# EAGLE board teensy-dsc (EAGLE 7.2.0)
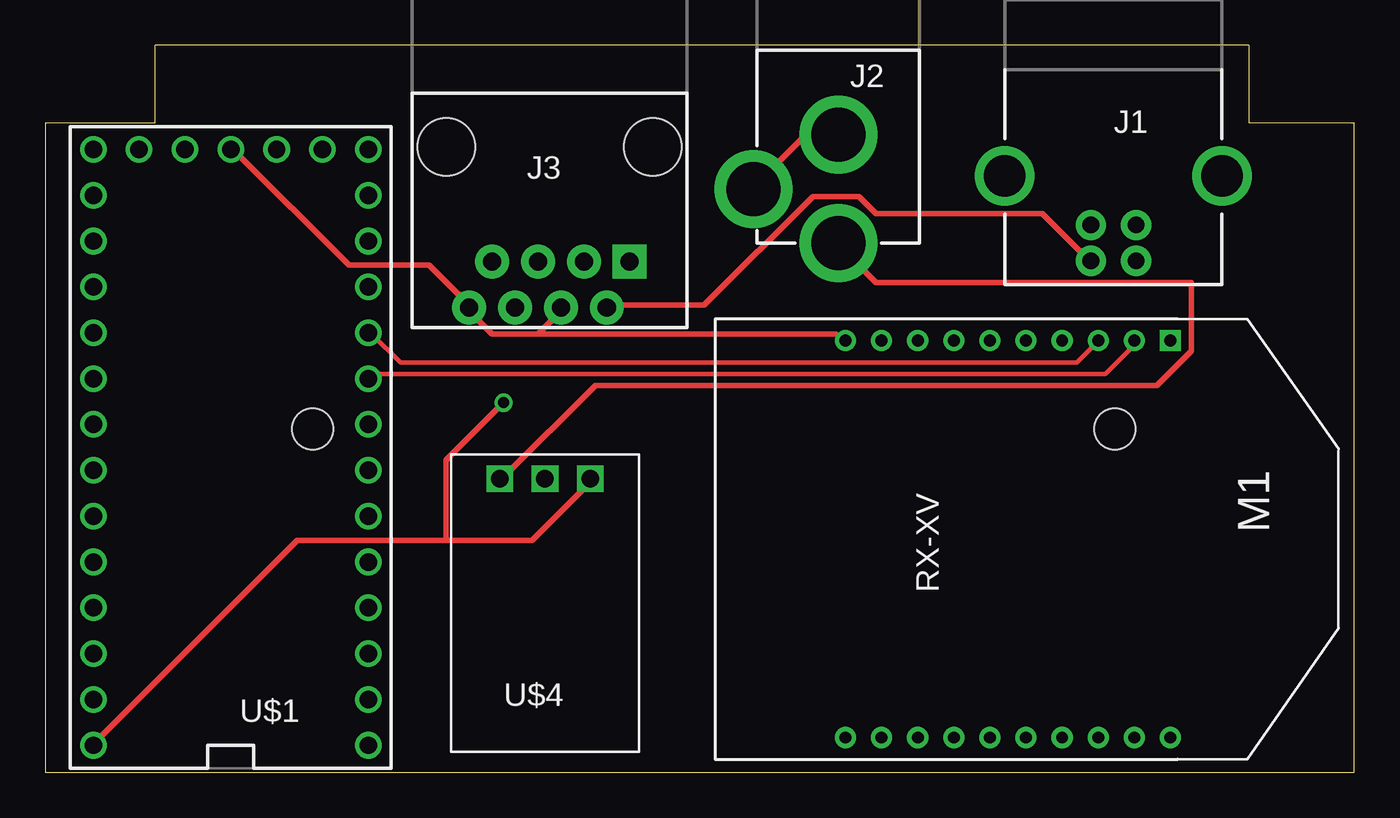
[diagram p0: board, top side]
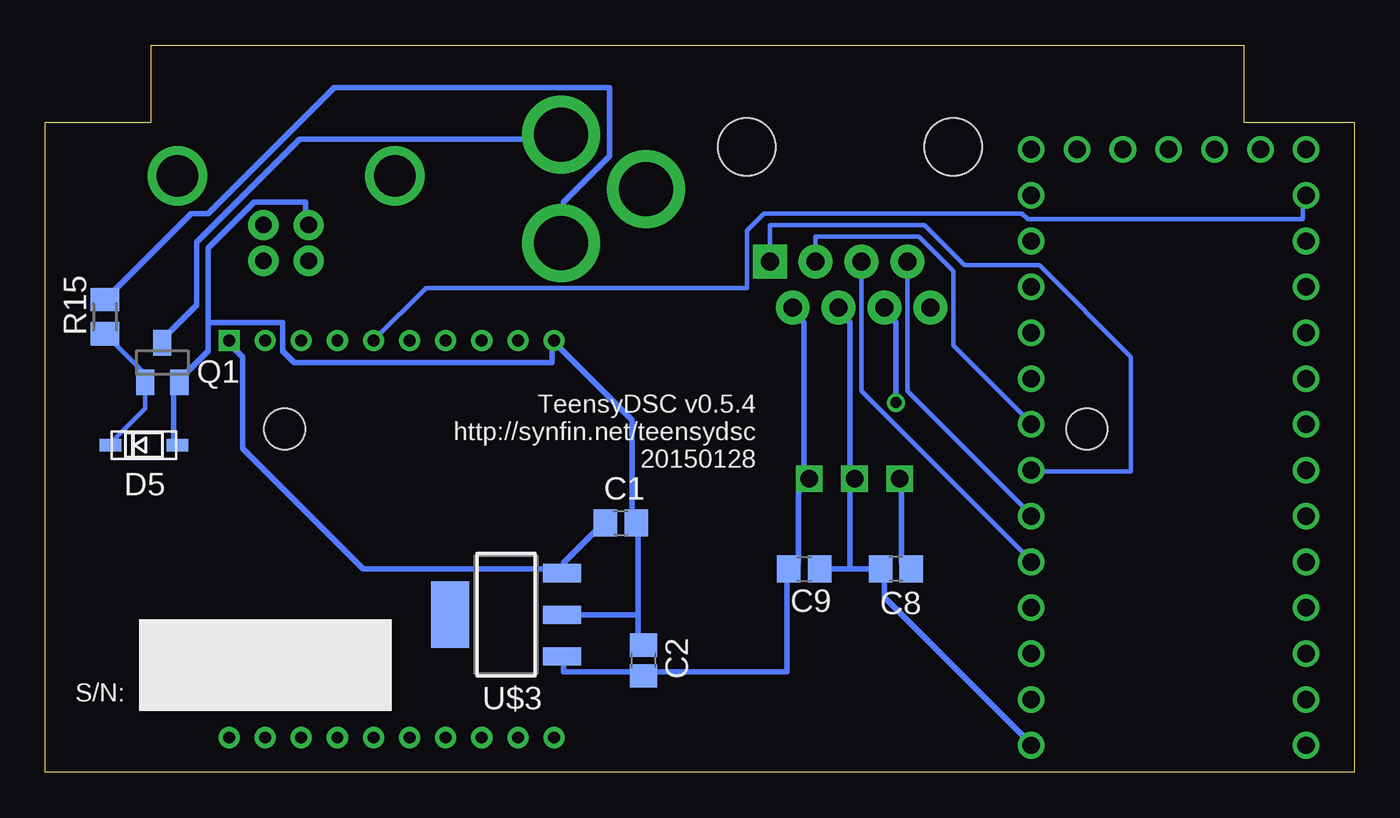
[diagram p1: board, bottom side, seen from below]

Size 72.53 x 40.3 mm. Coordinates in mm from the lower left corner, seen from the top.
Outline: 0,0 72.53,0 72.53,36 66.67,36 66.67,40.3 6.1,40.3 6.1,36 0,36 0,0
Copper layers (1*16): Top 0.035mm / dielectric 1.5mm / Bottom 0.035mm
Design rules "default": minimum track width 10mil, minimum drill 24mil, track to track 8mil, track to pad 8mil, pad to pad 8mil, via to via 8mil, smd to smd 8mil, copper to edge 40mil, drill to drill 8mil, minimum pad ring 10mil, minimum via ring 8mil, stop-mask expansion 4mil, vias tented up to drill 0mil, thermal gap 10mil
Net classes: 0 default: width 0.152 mm, clearance 0.127 mm; 1 5V: width 0.305 mm, clearance 0.127 mm; 2 GND: width 0.305 mm, clearance 0.127 mm; 3 12V: width 0.305 mm, clearance 0.127 mm
Holes 2.29 mm at 14.81,19.03 59.26,19.03

## Footprints (pad centres in the part's own frame; a part is rotated, then mirrored left to right if it is on the bottom)
C0805 = smd 1.3 x 1.5: 1 -0.85,0; 2 0.85,0
SOD-123 = smd 1.2 x 0.7: A 1.85,0; C -1.85,0
USB-B-PTH = drill 0.914 pad 1.676: D+ 0,1.25; D- 1.981,1.25; GND 0,-1.25; VBUS 1.981,-1.25 | drill 2.286: S1 -2.718,-6.02; S2 -2.718,6.02
POWER_JACK_PTH = drill 2.997 pad 4.318: GND 0,7.7; GNDBREAK 4.7,10.7; PWR 0,13.7
RJ45-8 = drill 1 pad 1.88 square: 1 -4.445,6.35 | drill 1 pad 1.88: 2 -3.175,8.89; 3 -1.905,6.35; 4 -0.635,8.89; 5 0.635,6.35; 6 1.905,8.89; 7 3.175,6.35; 8 4.445,8.89 | hole 3.2: -5.715,0; 5.715,0
RX-VN = drill 0.66 square: 1 -13.54,10.27 | drill 0.66: 2 -13.54,8.27; 3 -13.54,6.27; 4 -13.54,4.27; 5 -13.54,2.27; 6 -13.54,0.27; 7 -13.54,-1.73; 8 -13.54,-3.73; 9 -13.54,-5.73; 10 -13.54,-7.73; 11 8.46,-7.73; 12 8.46,-5.73; 13 8.46,-3.73; 14 8.46,-1.73; 15 8.46,0.27; 16 8.46,2.27; 17 8.46,4.27; 18 8.46,6.27; 19 8.46,8.27; 20 8.46,10.27
SOT23 = smd 1 x 1.4: 1 -0.95,-1.1; 2 0.95,-1.1; 3 0,1.1
M0805 = smd 1.3 x 1.6: 1 -0.95,0; 2 0.95,0
TEENSY_3.1_BASIC = drill 0.965: 0 -7.62,13.97; 1 -7.62,11.43; 2 -7.62,8.89; 3 -7.62,6.35; 3.3V 7.62,11.43; 3.3V1 -2.54,-16.51; 4 -7.62,3.81; 5 -7.62,1.27; 6 -7.62,-1.27; 7 -7.62,-3.81; 8 -7.62,-6.35; 9 -7.62,-8.89; 10 -7.62,-11.43; 11 -7.62,-13.97; 12 -7.62,-16.51; 13 7.62,-16.51; 14/A0 7.62,-13.97; 15/A1 7.62,-11.43; 16/A2 7.62,-8.89; 17/A3 7.62,-6.35; 18/A4 7.62,-3.81; 19/A5 7.62,-1.27; 20/A6 7.62,1.27; 21/A7 7.62,3.81; 22/A8 7.62,6.35; 23/A9 7.62,8.89; A14 5.08,-16.51; AGND 7.62,13.97; GND -7.62,16.51; GND1 0,-16.51; PGM 2.54,-16.51; VBAT -5.08,-16.51; VIN 7.62,16.51
SOT-223 = smd 1 x 2.1: 1 -2.3,-3.1; 2 0,-3.1; 3 2.3,-3.1 | smd 3.7 x 2.1: 4 0,3.1
OKI-78SR-H = drill 0.965 square: P$1 7.7,1.35; P$2 5.2,1.35; P$3 2.7,1.35

## Placement (x,y rotation side)
C1  1.0uF  [C0805]  40.64,13.82 0 bottom
C2  4.7uF  [C0805]  39.37,6.2 90 bottom
C8  10uF  [C0805]  25.4,11.28 180 bottom
C9  10uF  [C0805]  30.48,11.28 0 bottom
D5  10V Z  [SOD-123]  67.06,18.14 0 bottom
J1  USB-B  [USB-B-PTH]  59.18,30.33 270 top
J2  POWER_JACKPTH  [POWER_JACK_PTH]  43.94,43.03 180 top
J3  RJ45-8PTH  [RJ45-8]  27.94,34.65 180 top
M1  XBEERX-VN  [RX-VN]  52.07,10.39 270 top
Q1  IRLML6344  [SOT23]  66.04,22.71 0 bottom
R15  13.3k  [M0805]  69.22,25.25 90 bottom
U$1  TEENSY_3.1_BASIC  [TEENSY_3.1_BASIC]  10.29,18.01 180 top
U$3  MCP1825SOT-223-3  [SOT-223]  46.99,8.74 90 bottom
U$4  OKI-78SR  [OKI-78SR-H]  32.89,17.63 180 top

## Library data of the parts
C1 C2 C8 C9 R15 = resistor
D5 = adafruit
J1 = SparkFun-Connectors; PROD_ID: CONN-08278
J2 = SparkFun-Connectors; PROD_ID: PRT-00119
J3 = SparkFun-Connectors
M1 = xbee_r1
Q1 U$4 = synfinatic
U$1 = Teensy_3_Series_Board_v1.0
U$3 = SteelCaveRobotics-Power

## Nets
3.3V [5V]: C1.1 M1.1 U$3.3
5V [5V]: C2.1 C9.1 J1.VBUS J3.2 J3.6 U$1.VIN U$3.1 U$4.P$3
+12V [12V]: C8.1 J2.PWR R15.2 U$4.P$1
AGND: U$1.AGND
CHAN-A-ALT/DEC: J3.7 U$1.4
CHAN-A-AZ/RA: J3.3 U$1.6
CHAN-B-ALT/DEC: J3.5 U$1.3
CHAN-B-AZ/RA: J3.1 U$1.5
GND [GND]: C1.2 C2.2 C8.2 C9.2 D5.A J1.GND J3.4 J3.8 M1.10 Q1.2 U$1.GND U$1.GND1 U$3.2 U$4.P$2
GND_MAIN [GND]: J2.GND J2.GNDBREAK Q1.3
N$17: D5.C Q1.1 R15.1
XBEE_IN: M1.3 U$1.8
XBEE_OUT: M1.2 U$1.7
XBEE_RST: M1.5 U$1.14/A0

## Tracks (layer width: path | path; a pad name or v marks a point on that pad's centre or on a via)
3.3V
  Bottom 0.305: C1.1 41.59,13.82 43.81,11.6 43.81,11.28 U$3.3 44.13,11.28 54.93,11.28 61.59,17.95 61.59,23.03 62.23,23.66 M1.1
5V  (via drill 0.61)
  Top 0.305: J1.VBUS 57.78,28.42 55.24,30.97 46.04,30.97 45.08,31.92 42.54,31.92 36.51,25.88 31.11,25.88 J3.2 | 22.23,12.87 26.99,12.87 30.16,16.04 U$4.P$3 | 22.23,12.87 13.97,12.87 2.86,1.76 U$1.VIN | v25.4,20.49 22.23,17.31 22.23,12.87
  Bottom 0.305: 39.37,5.56 43.81,5.56 43.81,6.2 U$3.1 | 39.37,5.56 31.43,5.56 31.43,11.28 C9.1 31.11,11.28 30.8,11.6 30.8,15.73 30.48,16.04 U$4.P$3 30.48,16.36 30.48,24.93 31.11,25.57 J3.2 | 39.37,5.56 C2.1 | v25.4,20.49 25.4,24.93 26.04,25.57 J3.6
+12V
  Top 0.305: U$4.P$1 25.4,16.36 30.48,21.44 61.59,21.44 63.5,23.34 63.5,27.16 46.04,27.16 44.13,29.06 J2.PWR
  Bottom 0.305: C8.1 24.77,11.28 25.08,11.6 25.08,16.04 U$4.P$1 | R15.2 64.45,30.97 63.5,30.97 56.51,37.95 41.27,37.95 41.27,34.14 43.81,31.6 43.81,29.38 J2.PWR
CHAN-A-ALT/DEC
  Bottom 0.254: J3.7 24.77,21.12 18.1,14.45 U$1.4
CHAN-A-AZ/RA
  Bottom 0.254: J3.3 29.84,29.7 24.13,29.7 22.23,27.79 22.23,23.66 18.1,19.54 U$1.6
CHAN-B-ALT/DEC
  Bottom 0.254: J3.5 27.3,21.12 18.1,11.91 U$1.3
CHAN-B-AZ/RA
  Bottom 0.254: J3.1 32.38,30.33 23.81,30.33 21.59,28.11 17.46,28.11 12.38,23.03 12.38,16.68 17.78,16.68 U$1.5
GND
  Top 0.305: U$1.GND1 10.48,34.46 16.83,28.11 21.27,28.11 23.5,25.88 J3.8 23.5,25.57 24.77,24.3 27.3,24.3 | 27.3,24.3 28.57,25.57 J3.4 | 27.3,24.3 43.81,24.3 44.13,23.98 M1.10
  Bottom 0.305: D5.A 65.41,18.27 65.41,21.44 Q1.2 65.09,21.76 63.5,23.34 63.5,24.93 | 63.5,24.93 63.5,29.06 60.96,31.6 58.1,31.6 58.1,30.33 J1.GND | 39.69,8.74 39.69,13.82 C1.2 40,13.82 40,19.54 44.13,23.66 M1.10 44.45,23.66 44.45,22.71 58.74,22.71 59.37,23.34 59.37,24.93 63.5,24.93 | 39.69,8.74 39.69,7.47 39.37,7.15 C2.2 | 39.69,8.74 U$3.2 | C9.2 27.94,11.28 | 27.94,11.28 C8.2 26.04,11.28 26.04,9.69 18.1,1.76 U$1.GND | 27.94,11.28 27.94,16.04 U$4.P$2 27.94,16.36 27.94,24.93 28.57,25.57 J3.4
GND_MAIN
  Top 0.305: J2.GNDBREAK 39.37,32.55 41.91,35.09 43.81,35.09 J2.GND
  Bottom 0.305: Q1.3 66.04,23.98 64.14,25.88 64.14,29.38 58.42,35.09 44.13,35.09 J2.GND
N$17
  Bottom 0.254: D5.C 68.9,18.27 66.99,20.17 66.99,21.44 Q1.1 66.99,21.76 66.99,22.07 R15.1
XBEE_IN
  Top 0.254: M1.3 58.1,23.66 57.15,22.71 19.68,22.71 18.1,24.3 U$1.8
XBEE_OUT
  Top 0.254: M1.2 60.32,23.66 58.74,22.07 18.1,22.07 U$1.7
XBEE_RST
  Bottom 0.254: M1.5 54.29,23.98 51.43,26.84 33.65,26.84 33.65,30.01 32.7,30.97 18.41,30.97 18.1,30.65 2.86,30.65 2.86,31.92 U$1.14/A0

## Text on the board
tPlace: J3
bPlace: TeensyDSC v0.5.4 / http://synfin.net/teensydsc / 20150128
tNames: U$4
bNames: S/N: